# EAGLE board PCB version 1 v2 (EAGLE 9.7.0)
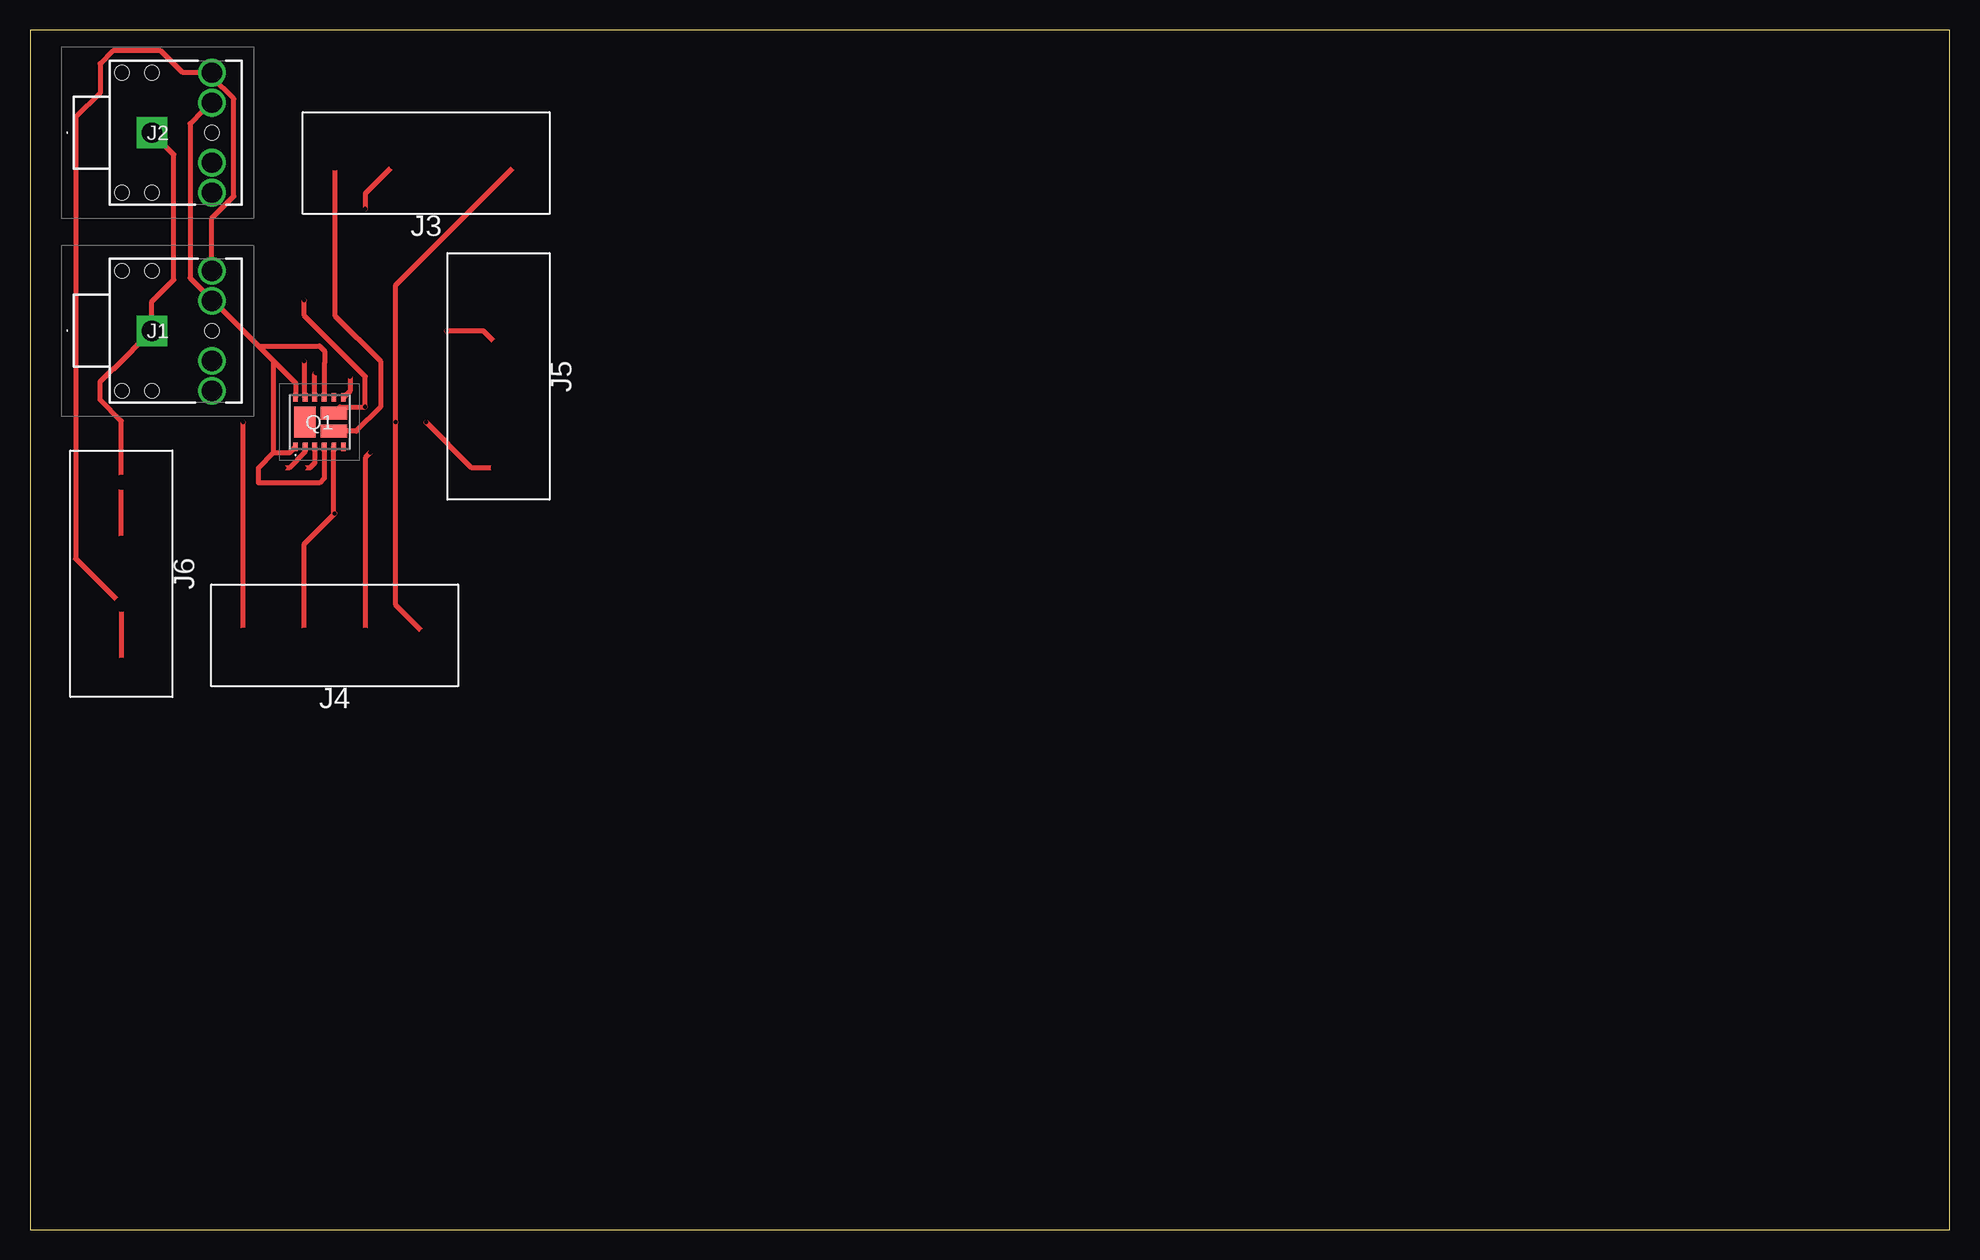
[diagram p0: board, top side]
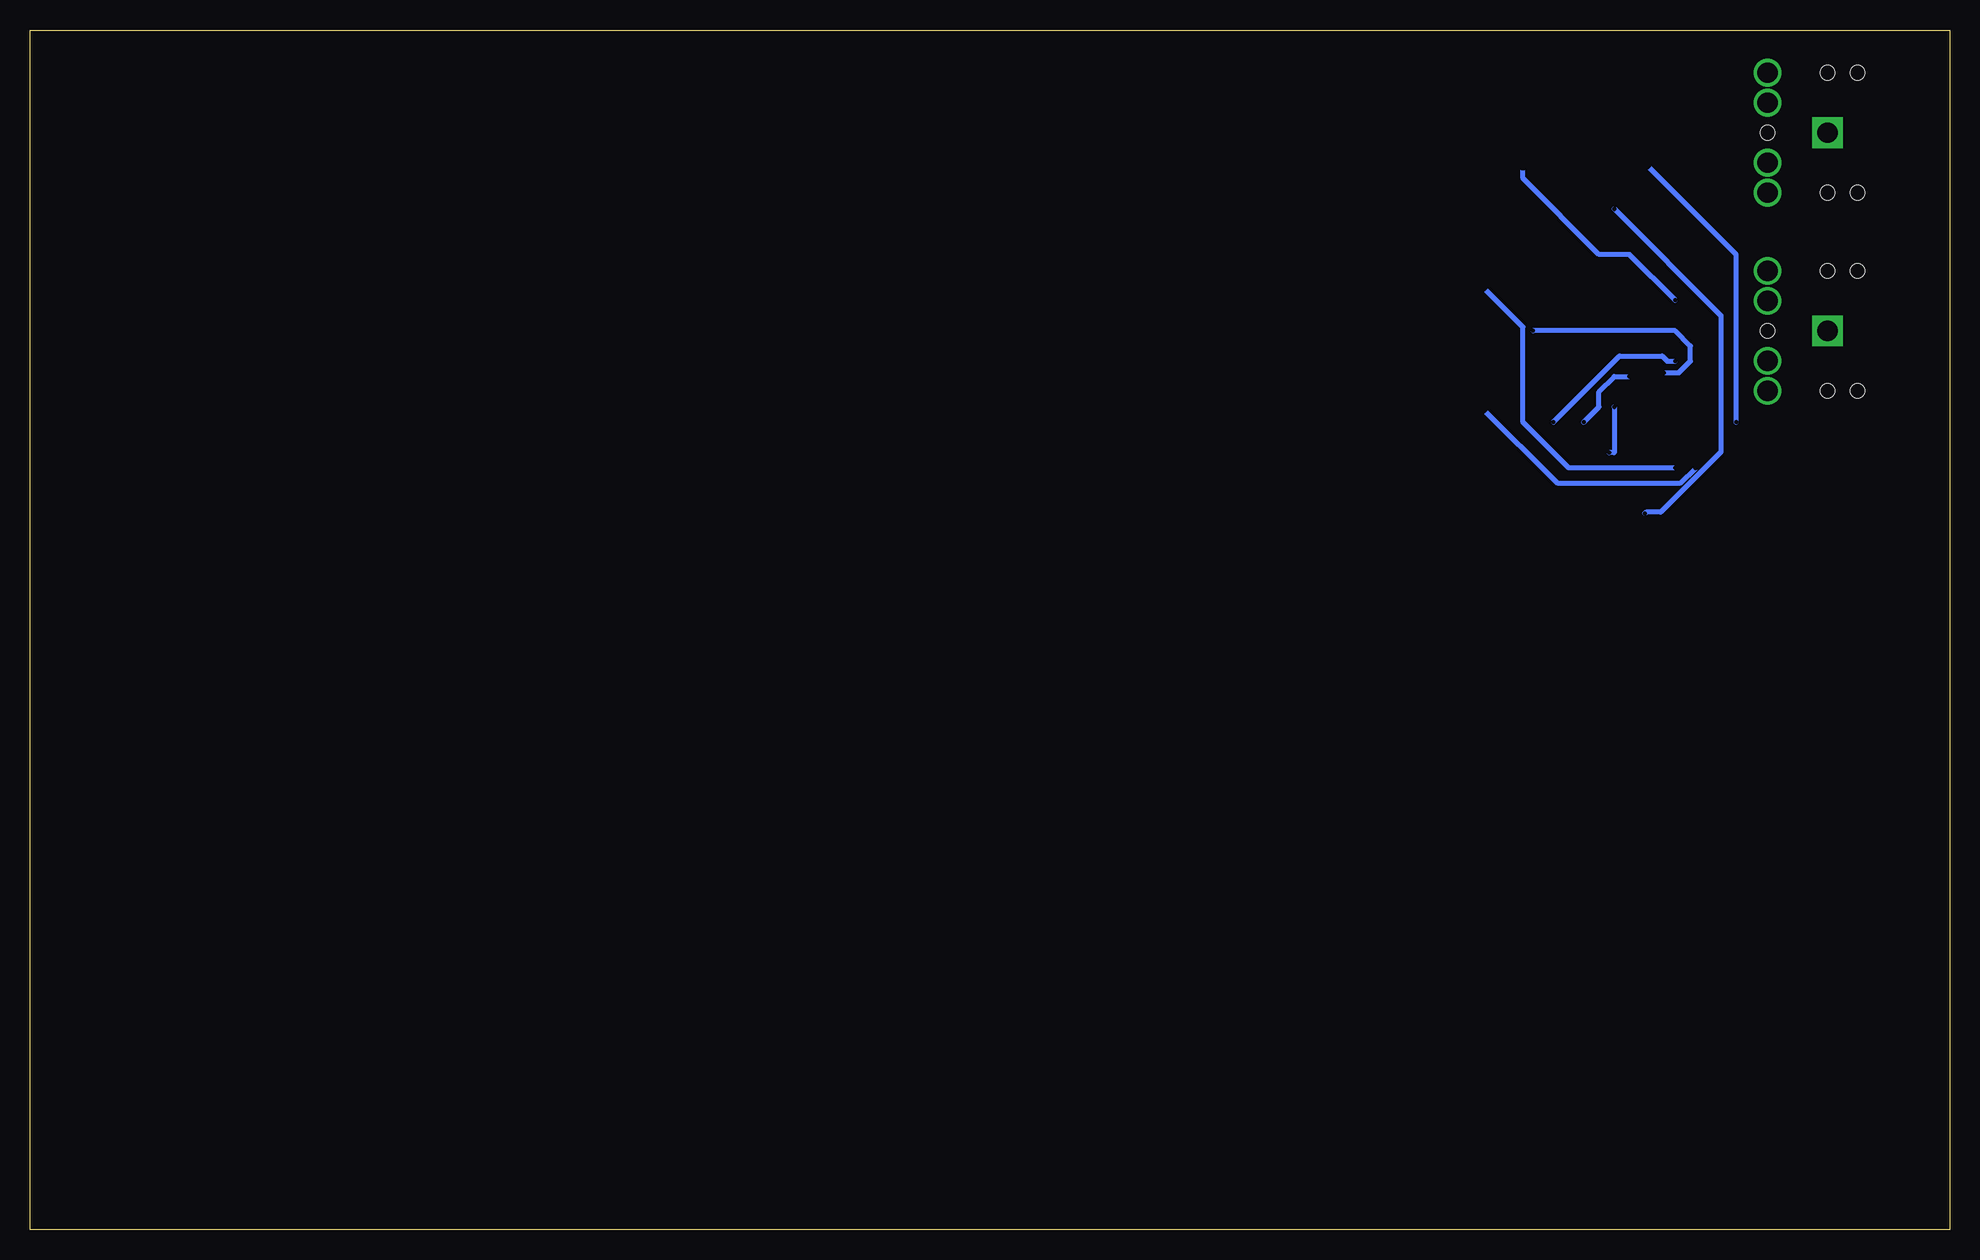
[diagram p1: board, bottom side, seen from below]

Size 160 x 100 mm. Coordinates in mm from the lower left corner, seen from the top.
Outline: 0,0 160,0 160,100 0,100 0,0
Copper layers (1*16): Top / Bottom
Stack-up Default Layer Stack: Top User Defined 0.035mm / Dielectric-1 User Defined 1.5mm / Bottom User Defined 0.035mm
Design rules: minimum copper width 6mil, minimum drill size 0.35mm, copper clearance wire_polygon to wire_polygon 6mil, copper clearance wire_polygon to pad_smd 6mil, copper clearance wire_polygon to via 6mil, copper clearance pad_smd to pad_smd 6mil, copper clearance pad_smd to via 6mil, copper clearance via to via 6mil, copper clearance smd to pad (same net) 6mil, copper clearance smd to via (same net) 6mil, copper clearance smd to smd (same net) 6mil, dimension clearance 40mil, restrict clearance 0mil, drill distance 6mil, keepout clearance 0mil

## Footprints (pad centres in the part's own frame; a part is rotated, then mirrored left to right if it is on the bottom)
PRT08032 = drill 1.7 pad 2.55 square: 1 0,0 | drill 1.7 pad 2.3: 2 5,5; 3 5,2.5; 4 5,-2.5; 5 5,-5 | hole 1.2: -2.5,5; 0,5; -2.5,-5; 0,-5; 5,0
TERMBLK_508-4N = drill 1.2: 1 0,0; 2 5.08,0; 3 10.16,0; 4 15.24,0
DMHT6016LFJ13 = smd 0.4 x 0.7: 1 -2,-2.05; 2 -1.2,-2.05; 3 -0.4,-2.05; 4 0.4,-2.05; 5 1.2,-2.05; 6 2,-2.05; 7 2,2.05; 8 1.2,2.05; 9 0.4,2.05; 10 -0.4,2.05; 11 -1.2,2.05; 12 -2,2.05 | smd 2.2 x 1.1: 13 1.2,-0.75; 14 1.2,0.75 | smd 1.8 x 2.6: 15 -1.2,0

## Placement (x,y rotation side)
J1  PRT-08032  [PRT08032]  10.16,74.93 0 top
J2  PRT-08032  [PRT08032]  10.16,91.44 0 top
J3  2828XX-4282837-4  [TERMBLK_508-4N]  25.4,88.9 0 top
J4  2828XX-4282837-4  [TERMBLK_508-4N]  17.78,49.53 0 top
J5  2828XX-4282837-4  [TERMBLK_508-4N]  39.06,63.5 90 top
J6  2828XX-4282837-4  [TERMBLK_508-4N]  7.62,47.05 90 top
Q1  DMHT6016LFJ-13  [DMHT6016LFJ13]  24.13,67.31 0 top

## Library data of the parts
J1 J2 = SamacSys_Parts; ARROW_PART_NUMBER: PRT-08032; ARROW_PRICE-STOCK: https://www.arrow.com/en/products/prt-08032/sparkfun-electronics; DESCRIPTION: 3.50mm (0.141", 1/8", Mini Plug) - Headphone Phone Jack Stereo (3 Conductor, TRS) Connector Solder; HEIGHT: 6.15mm; MANUFACTURER_NAME: SparkFun; MANUFACTURER_PART_NUMBER: PRT-08032; MOUSER_PART_NUMBER: 474-PRT-08032; MOUSER_PRICE-STOCK: https://www.mouser.co.uk/ProductDetail/SparkFun/PRT-08032?qs=WyAARYrbSnZFBWwuc8Qktw%3D%3D
J3-J6 = Connector; CATEGORY: Fixed Terminal Blocks; DESCRIPTION: Fixed Terminal Blocks 5.08MM PCB MOUNT 4P; MANUFACTURER: TE Connectivity AMP Connectors; MPN: 282837-4; OPERATING_TEMPERATURE: -40°C ~ 105°C; PART_STATUS: Active; PITCH: 0.200" (5.08mm); ROHS_COMPLIANCE: RoHS Compliant; SERIES: Buchanan; SUBCATEGORY: Terminal Blocks; TYPE: Through Hole; Screw - Rising Cage Clamp; Side wire entry, Horizontal with Board
Q1 = DMHT6016LFJ-13; DESCRIPTION: MOSFET MOSFET BVDSS: 41V-60V; HEIGHT: 0.8mm; MANUFACTURER_NAME: Diodes Incorporated; MANUFACTURER_PART_NUMBER: DMHT6016LFJ-13; MOUSER_PART_NUMBER: 621-DMHT6016LFJ-13; MOUSER_PRICE-STOCK: https://www.mouser.co.uk/ProductDetail/Diodes-Incorporated/DMHT6016LFJ-13?qs=AQlKX63v8RuRA1AfUZIZiQ%3D%3D

## Nets
N$1: J1.1 J2.1 J6.3 J6.4
N$2: J1.2 J2.2 J6.1 J6.2
N$3: J1.3 J2.3 Q1.1 Q1.4 Q1.9 Q1.12
N$4: J3.4 J4.4 Q1.7
N$5: J3.1 J4.1 Q1.13
N$6: J3.3 J4.3 Q1.14
N$7: J3.2 J4.2 Q1.5
N$8: J5.3 Q1.10
N$9: J5.1 Q1.11
N$10: J5.2 Q1.2
N$11: J5.4 Q1.3

## Tracks (layer width: path | path; a pad name or v marks a point on that pad's centre or on a via)
N$1
  Top 0.406: J6.3 J6.4 7.62,67.4 5.84,69.18 5.84,70.68 6.91,71.75 6.98,71.75 J1.1 10.16,77.36 11.98,79.18 11.98,89.62 J2.1
N$2
  Top 0.406: J6.1 J6.2 3.81,55.94 3.81,92.71 5.84,94.74 5.84,97.19 6.91,98.26 10.91,98.26 12.73,96.44 J2.2 | J2.2 15.24,96.52 | J1.2 15.16,84.31 16.98,86.13 16.98,94.25 15.16,96.07 J2.2
N$3
  Top 0.406: 15.2,77.47 J1.3 | 20.32,72.39 19.05,73.66 | 19.05,73.66 15.24,77.47 15.2,77.47 | 20.32,72.39 22.13,70.58 Q1.12 | 19.05,73.66 24.13,73.66 24.56,73.23 24.56,72.21 24.53,72.18 Q1.9 | Q1.1 21.64,64.77 20.32,64.77 | 20.32,64.77 20.32,72.39 | Q1.4 24.53,62.63 24.13,62.23 19.05,62.23 19.05,63.5 20.32,64.77 | J2.3 14.48,93.26 14.41,93.26 13.34,92.19 13.34,79.33 15.2,77.47
N$4  (via drill 0.35)
  Top 0.406: J4.4 30.48,52.07 v30.48,67.31 30.48,78.74 J3.4 | v26.67,71.12 26.67,69.9 Q1.7
  Bottom 0.406: v30.48,67.31 29.21,68.58 29.21,69.85 27.94,71.12 v26.67,71.12
N$5  (via drill 0.35)
  Top 0.406: J3.1 25.4,76.2 29.21,72.39 29.21,68.58 27.19,66.56 Q1.13 | J4.1 v17.78,67.31
  Bottom 0.406: v17.78,67.31 17.78,81.28 J3.1
N$6  (via drill 0.35)
  Top 0.406: Q1.14 25.85,68.58 v27.94,68.58 27.94,71.12 22.86,76.2 v22.86,77.47 | v28.37,64.77 27.94,64.34 J4.3
  Bottom 0.406: v27.94,68.58 27.94,64.77 v28.37,64.77 | v22.86,77.47 26.67,81.28 29.21,81.28 35.56,87.63 J3.3
N$7  (via drill 0.35)
  Top 0.406: J3.2 27.94,86.36 v27.94,85.09 | J4.2 22.86,57.15 v25.4,59.69 25.33,59.76 Q1.5
  Bottom 0.406: v27.94,85.09 19.05,76.2 19.05,64.82 24.06,59.81 25.28,59.81 v25.4,59.69
N$8  (via drill 0.35)
  Top 0.406: Q1.10 23.73,71.33 v23.83,71.42 | v34.72,74.93 37.79,74.93 J5.3
  Bottom 0.406: v23.83,71.42 22.56,71.42 21.59,72.39 21.59,73.66 22.86,74.93 v34.72,74.93
N$9  (via drill 0.35)
  Top 0.406: Q1.11 22.86,69.43 v22.86,72.39 | v33.02,67.31 36.83,63.5 J5.1
  Bottom 0.406: v22.86,72.39 23.52,72.39 23.95,72.82 27.51,72.82 v33.02,67.31
N$10  (via drill 0.35)
  Top 0.406: v21.16,63.5 21.59,63.5 22.93,64.84 Q1.2
  Bottom 0.406: v21.16,63.5 22.43,62.23 32.71,62.23 J5.2
N$11  (via drill 0.35)
  Top 0.406: Q1.3 23.73,63.9 23.33,63.5 v22.86,63.5
  Bottom 0.406: v22.86,63.5 31.75,63.5 35.56,67.31 35.56,75.24 J5.4